# Altium PCB PCB.PcbDoc (part 1 of 2)
Units mm, origin at the board's own origin, x right, y up, seen from the top; angles counter-clockwise.
Board outline 25.16 x 25.16 mm, 8 copper layers (Top Layer, Mid-Layer 1, Mid-Layer 2, GND, PWR, Mid-Layer 3, Mid-Layer 4, Bottom Layer); 154 components, 133 nets, 602 pads, 294 vias.
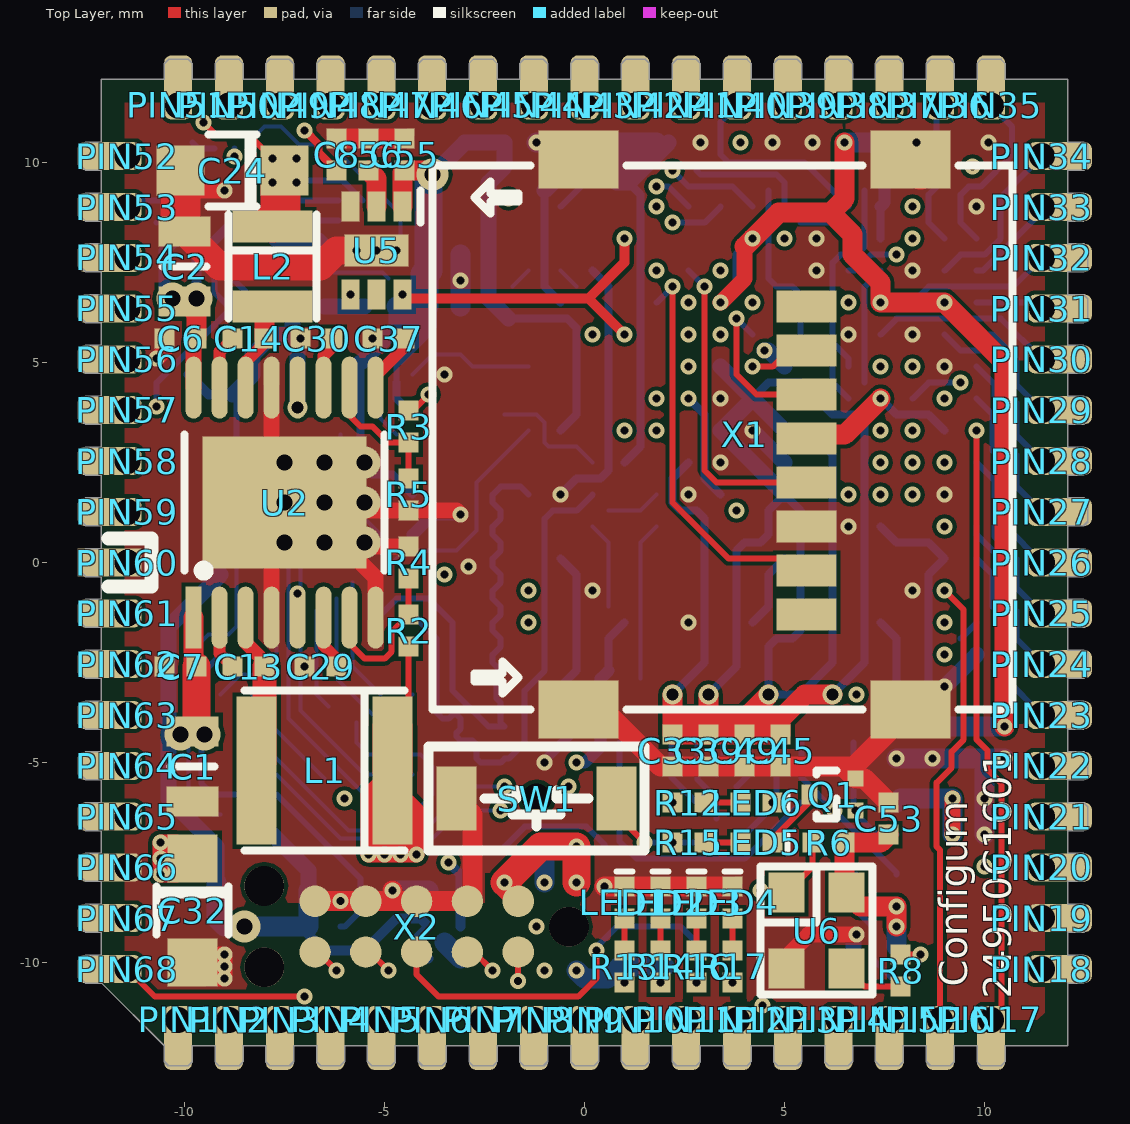
[diagram p0: Top Layer view]
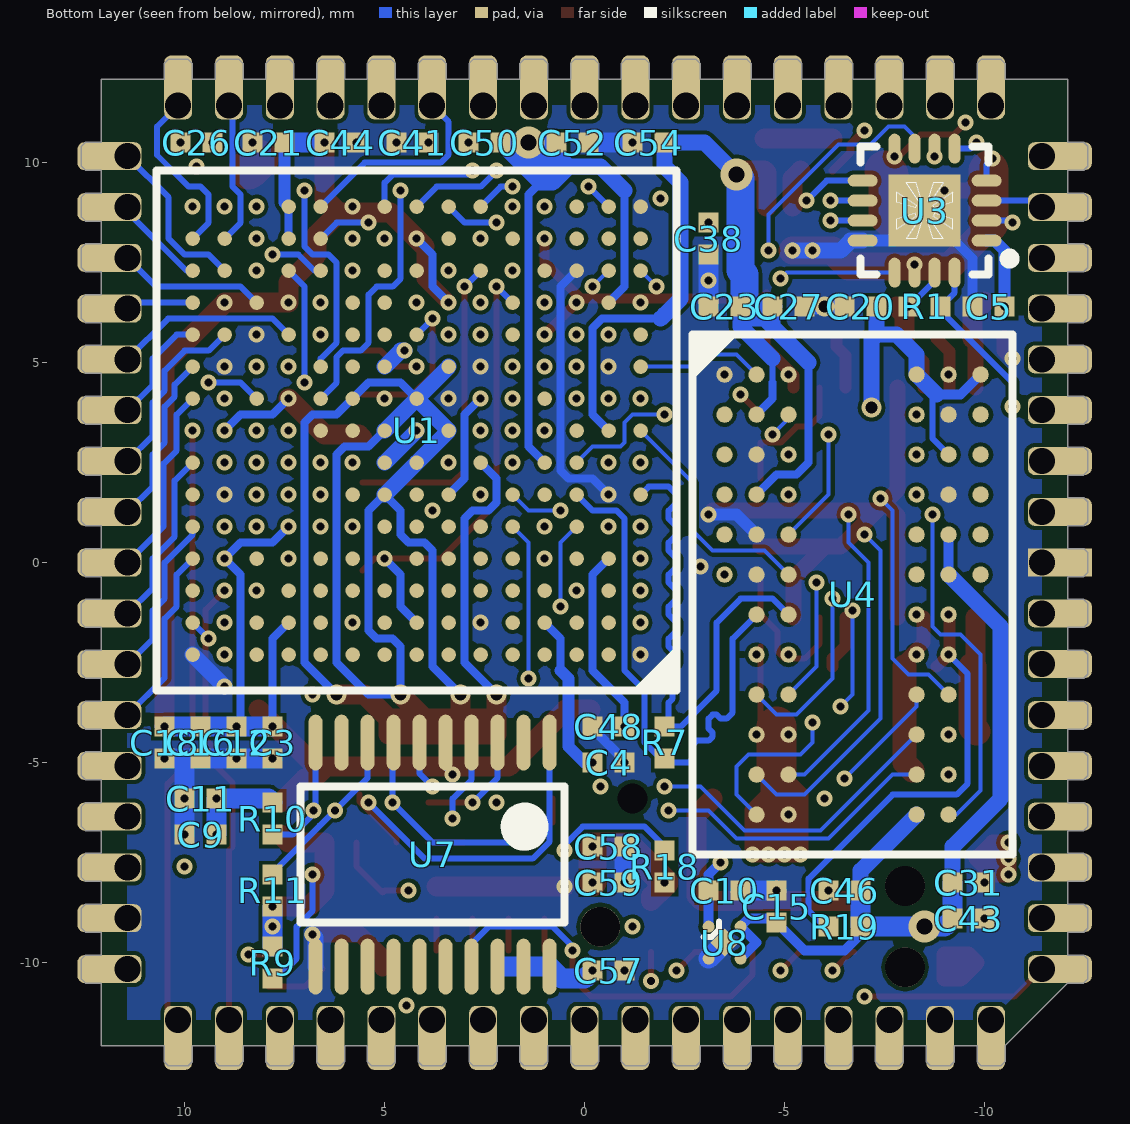
[diagram p1: Bottom Layer view, seen from below]
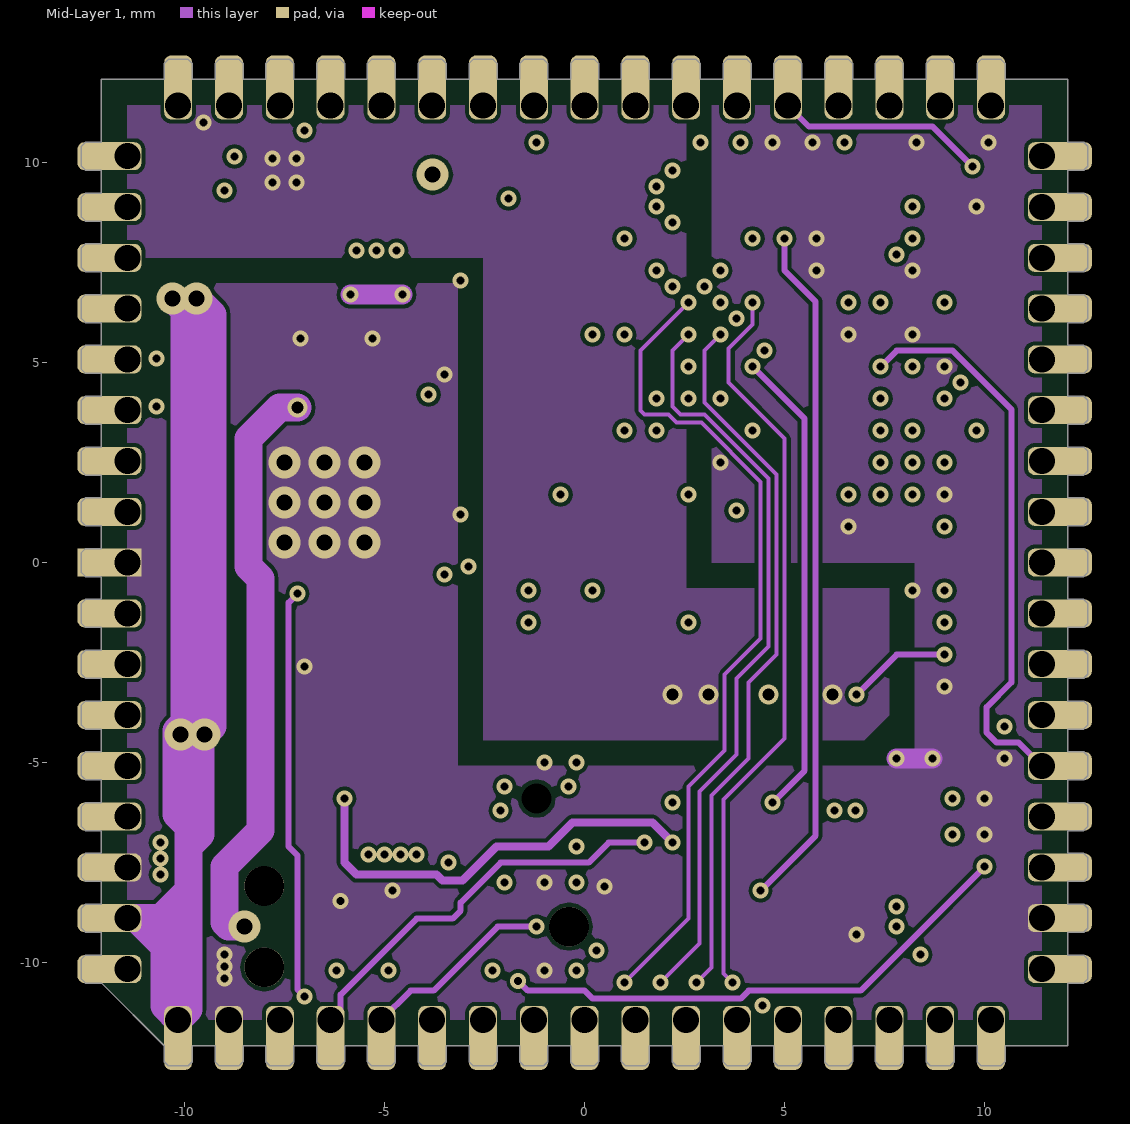
[diagram p2: Mid-Layer 1]
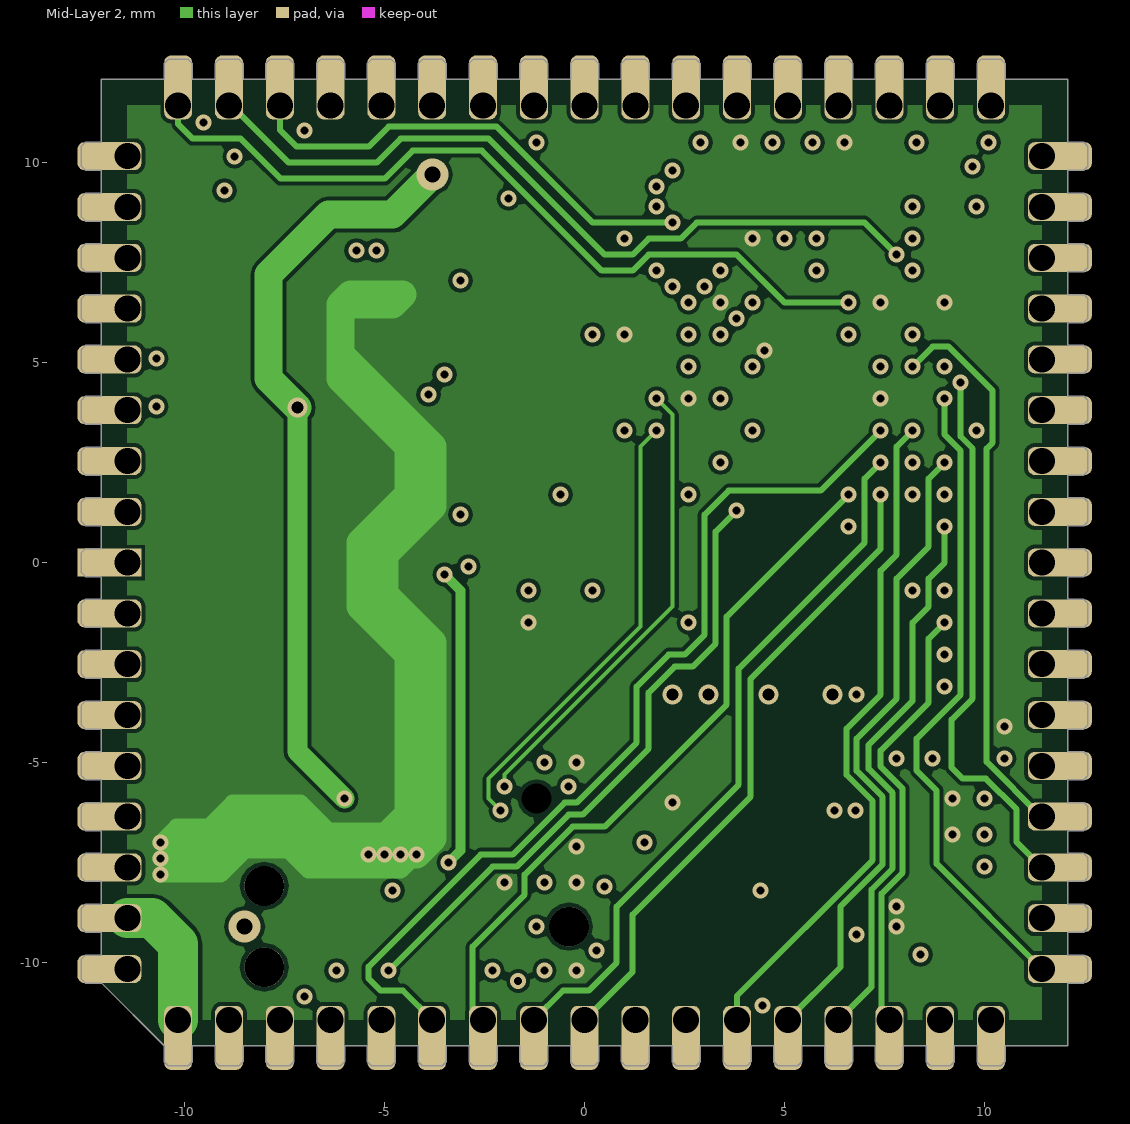
[diagram p3: Mid-Layer 2]
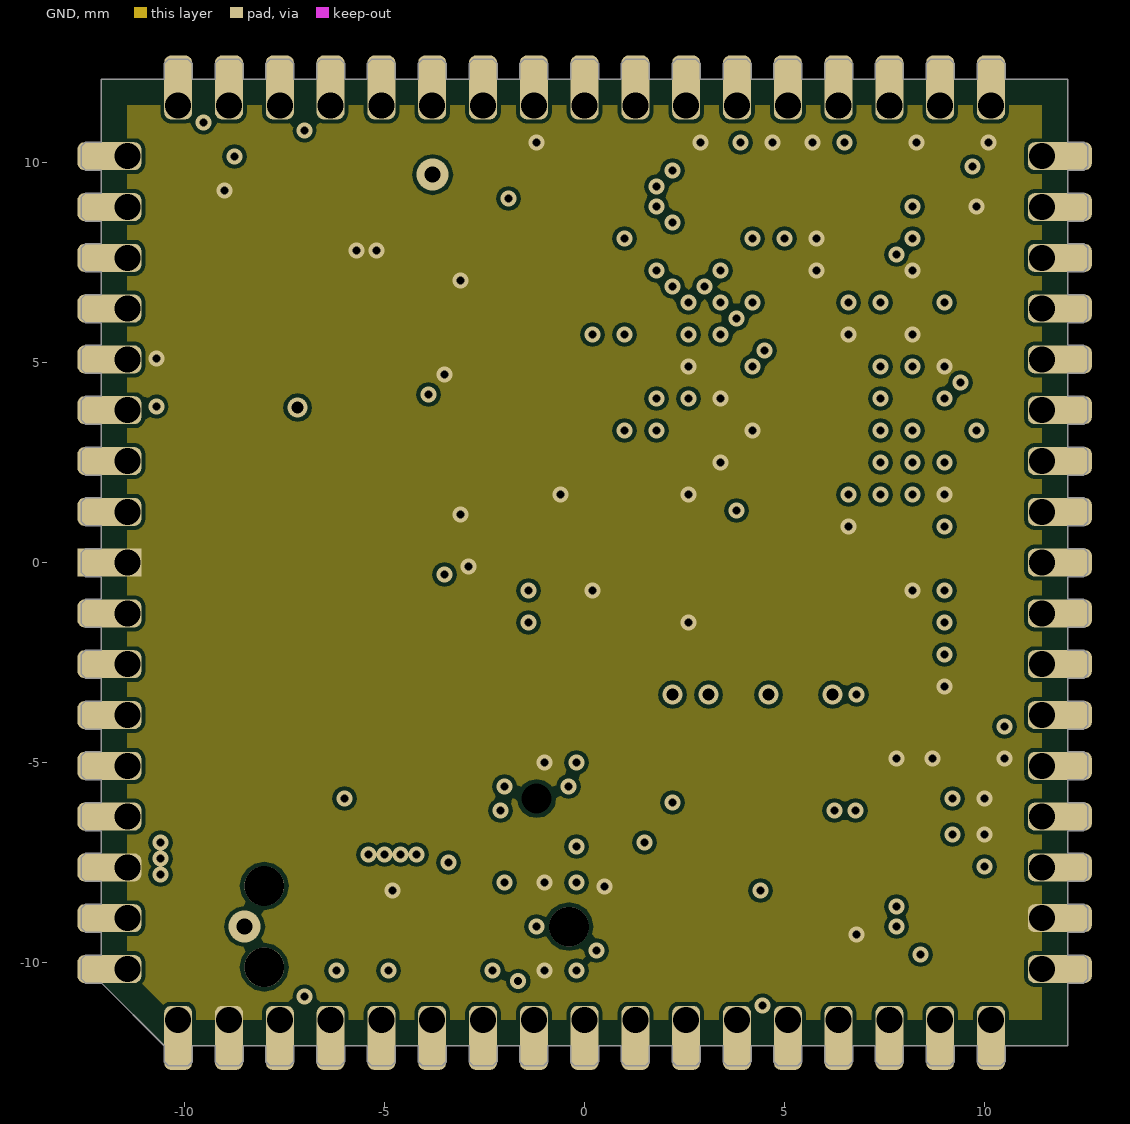
[diagram p4: GND]
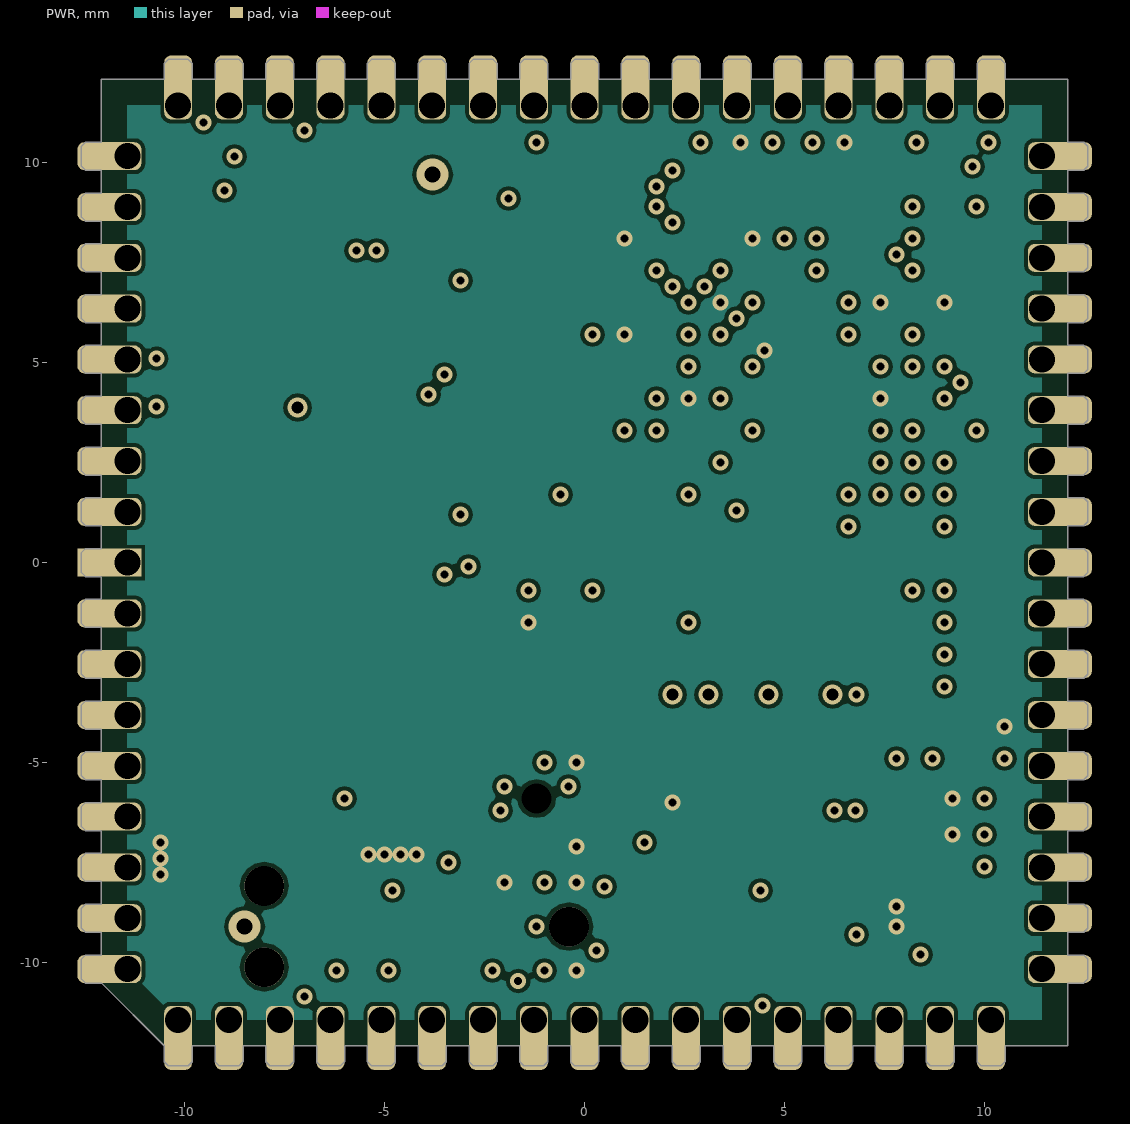
[diagram p5: PWR]
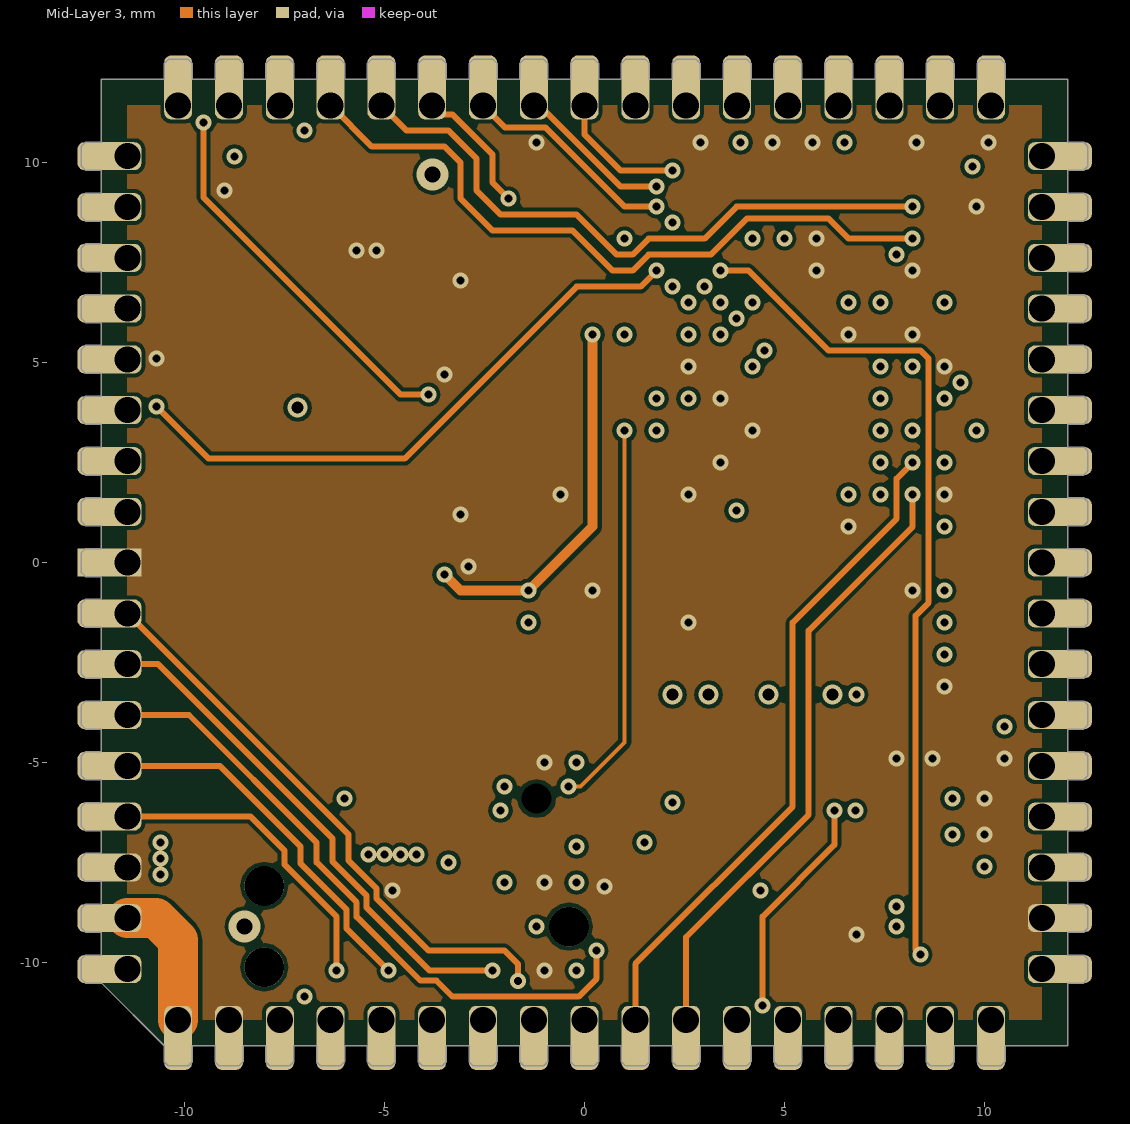
[diagram p6: Mid-Layer 3]
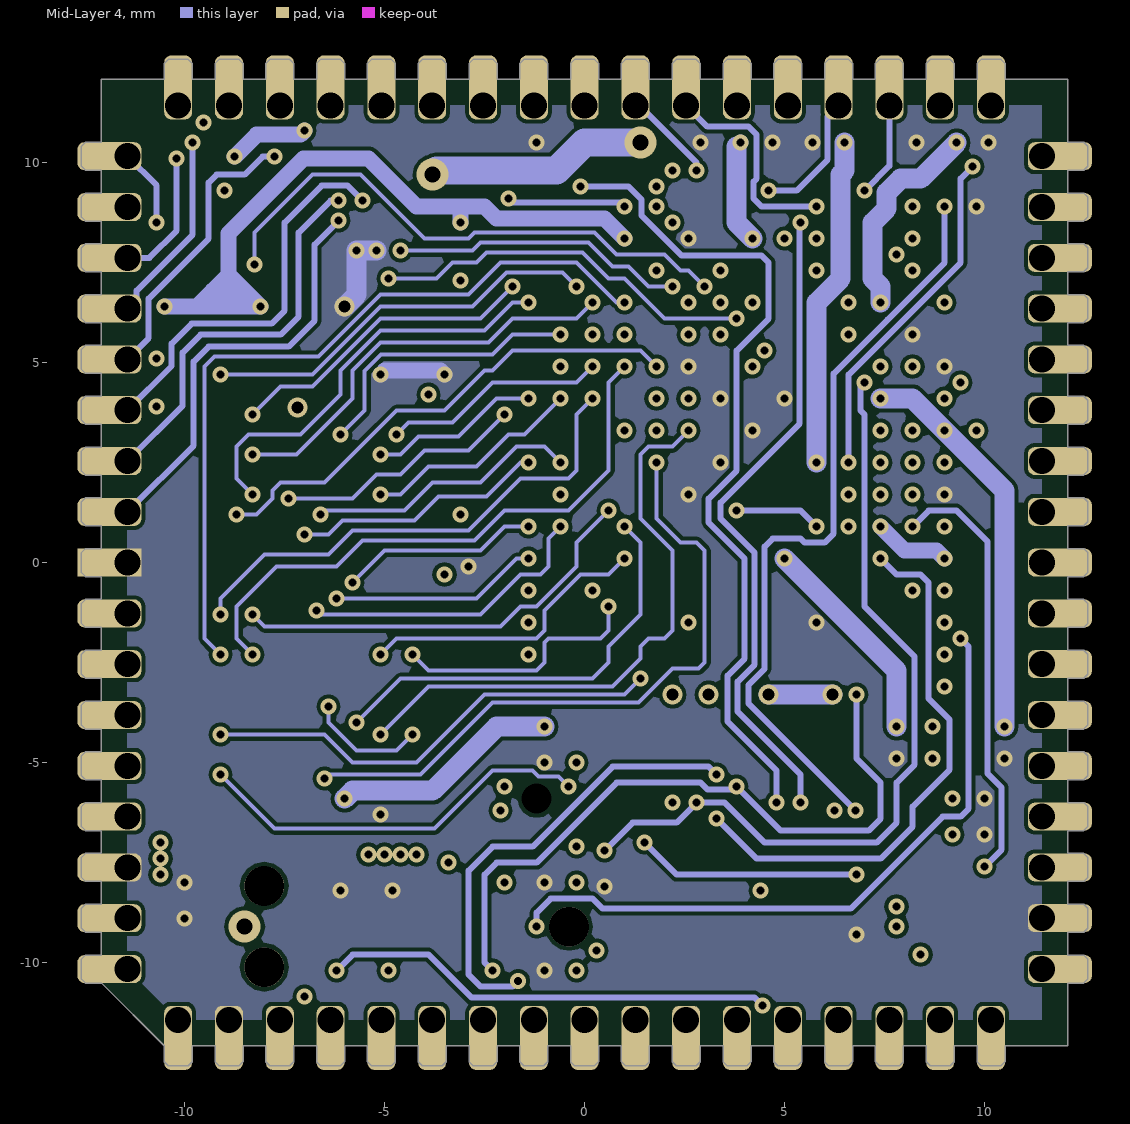
[diagram p7: Mid-Layer 4]

## Layer stack, top to bottom
Top Solder: solder mask 0.0102, Solder Resist, Dk 3.5
Top Layer: signal copper 0.0356
Dielectric1: core 0.32, FR-4, Dk 4.8
Mid-Layer 1: signal copper 0.0356
Dielectric2: prepreg 0.32, FR-4, Dk 4.8
Mid-Layer 2: signal copper 0.0356
Dielectric3: core 0.32, FR-4, Dk 4.8
GND: signal copper 0.0356
Dielectric6: prepreg 0.32, FR-4, Dk 4.8
PWR: signal copper 0.0356
Dielectric7: core 0.32, FR-4, Dk 4.8
Mid-Layer 3: signal copper 0.0356
Dielectric4: prepreg 0.32, FR-4, Dk 4.8
Mid-Layer 4: signal copper 0.0356
Dielectric5: core 0.32, FR-4, Dk 4.8
Bottom Layer: signal copper 0.0356
Bottom Solder: solder mask 0.0102, Solder Resist, Dk 3.5

## Board outline
412 vertices, not listed, extent -12.58,-12.58 12.58,12.58

## Design rules (kind name [scope] priority, off if disabled: settings)
Clearance [All] p1: gap=0.1
ComponentClearance [All] p1: gap=0.25 collisioncheckmode=3 verticalgap=0.25 showdistances=FALSE
Height [All] p1: minheight=0 maxheight=20 prefheight=1
HoleSize [All] p1: absolutevalues=TRUE maxlimit=25 minlimit=0.025 maxpercent=80.000 minpercent=20.000
HoleToHoleClearance [All] p1: gap=0 allowstackedmicrovias=TRUE
MinimumSolderMaskSliver [All] p1: minsoldermaskwidth=-25
PolygonConnect [All] p1: connectstyle=Direct reliefconductorwidth=0.254 reliefentries=4 polygonreliefangle="90 Angle" airgapwidth=0.254
RoutingCorners [All] p1: cornerstyle=45-Degree minsetback=2.5 maxsetback=2.5
RoutingTopology [All] p1: topology=Daisy_Balanced
RoutingVias [All] p1: holewidth=0.2 width=0.4 viastyle="Through Hole" minholewidth=0.2 minwidth=0.4 maxholewidth=0.75 maxwidth=1.5
SilkToSilkClearance [All] p1: silktosilkclearance=-25
SilkToSolderMaskClearance SilkscreenOverComponentPads [IsPad] p1: minsilkscreentomaskgap=-25 clearancetoexposedcopper=TRUE
SolderMaskExpansion [All] p1: expansion=0.102
Width [All] p1: maxlimit=1 minlimit=0.1 preferedwidth=0.15
21 further rules are at their usual default settings.

## Components (designator, comment, footprint, x,y, rotation, side; value= is the part's Value field where it differs from the comment)
C1 "C2012X5R1V106K085AC" _0805 -9.8,-5.1 r90 top
C2 "C2012X5R1V106K085AC" _0805 -10,7.4 r90 top
C3 "1u" _0402 7.8,-4.5 r90 bottom
C4 "1u" _0402 -0.6,-5 r180 bottom
C5 "1u" _0402 -10.1,6.4 r180 bottom
C6 "100n" _0402 -10.1,5.6 r0 top
C7 "100n" _0402 -10.1,-2.6 r180 top
C8 "1u" _0402 -6.2,10.2 r90 top
C9 "1u" _0402 9.6,-6.8 r180 bottom
C10 "1u" _0402 -3.5,-8.2 r0 bottom
C11 "1u" _0402 9.6,-5.9 r180 bottom
C12 "1u" _0402 8.7,-4.5 r270 bottom
C13 "100n" _0402 -8.4,-2.6 r180 top
C14 "100n" _0402 -8.4,5.6 r180 top
C15 "1u" _0402 -4.8,-8.6 r270 bottom
C16 "1u" _0402 9.6,-4.5 r270 bottom
C18 "1u" _0402 10.5,-4.5 r90 bottom
C20 "1u" _0402 -6.9,6.4 r0 bottom
C21 "1u" _0402 7.9,10.5 r180 bottom
C23 "1u" _0402 -3.5,6.4 r0 bottom
C24 "JMK316ABJ476MLHT" "Case A (3216)" -8.8,9.8 r180 top
C26 "1u" _0402 9.7,10.5 r0 bottom
C27 "1u" _0402 -5.1,6.4 r180 bottom
C29 "1n" _0402 -6.6,-2.6 r0 top
C30 "1n" _0402 -6.7,5.6 r0 top
C31 "1u" _0402 -9.6,-8 r180 bottom
C32 "JMK316ABJ476MLHT" "Case A (3216)" -9.8,-8.7 r270 top
C33 "1u" _0402 2.2,-4.7 r270 top
C37 "1u" _0402 -4.9,5.6 r180 top
C38 "1u" _0402 -3.1,8.1 r90 bottom
C39 "1u" _0402 3.1,-4.7 r270 top
C41 "1u" _0402 4.3,10.5 r180 bottom
C43 "1u" _0402 -9.6,-8.9 r180 bottom
C44 "1u" _0402 6.1,10.5 r0 bottom
C45 "1u" _0402 4.9,-4.7 r270 top
C46 "1u" _0402 -6.5,-8.2 r0 bottom
C48 "1u" _0402 -0.6,-4.1 r180 bottom
C49 "1u" _0402 4,-4.7 r270 top
C50 "1u" _0402 2.5,10.5 r180 bottom
C52 "1u" _0402 0.3,10.5 r0 bottom
C53 "1u" _0402 7.6,-6.4 r90 top
C54 "1u" _0402 -1.6,10.5 r180 bottom
C55 "1u" _0402 -4.5,10.2 r90 top
C56 "1u" _0402 -5.4,10.2 r270 top
C57 "1u" _0402 -0.6,-10.2 r0 bottom
C58 "1u" _0402 -0.6,-7.1 r0 bottom
C59 "1u" _0402 -0.6,-8 r0 bottom
L1 "XAL4030-332MEB" IND_4X4 -6.5,-5.2 r180 top
L2 "SRP2512-2R2M" IND_2.5x2 -7.8,7.4 r270 top
LED1 "0402R" _0402+ 1,-8.5 r270 top
LED2 "0402Y" _0402+ 1.9,-8.5 r270 top
LED3 "0402G" _0402+ 2.8,-8.5 r270 top
LED4 "0402B" _0402+ 3.7,-8.5 r270 top
LED5 "0402G" _0402+ 4.3,-7 r180 top
LED6 "0402Y" _0402+ 4.3,-6 r180 top
PIN1 "Pin/Pad" "PLCC68 pin"#1 -10.16,-11.43 r0 top
PIN2 "Pin/Pad" "PLCC68 pin"#2 -8.89,-11.43 r0 top
PIN3 "Pin/Pad" "PLCC68 pin"#3 -7.62,-11.43 r0 top
PIN4 "Pin/Pad" "PLCC68 pin"#4 -6.35,-11.43 r0 top
PIN5 "Pin/Pad" "PLCC68 pin"#5 -5.08,-11.43 r0 top
PIN6 "Pin/Pad" "PLCC68 pin"#6 -3.81,-11.43 r0 top
PIN7 "Pin/Pad" "PLCC68 pin"#7 -2.54,-11.43 r0 top
PIN8 "Pin/Pad" "PLCC68 pin"#8 -1.27,-11.43 r0 top
PIN9 "Pin/Pad" "PLCC68 pin"#9 0,-11.43 r0 top
PIN10 "Pin/Pad" "PLCC68 pin"#10 1.27,-11.43 r0 top
PIN11 "Pin/Pad" "PLCC68 pin"#11 2.54,-11.43 r0 top
PIN12 "Pin/Pad" "PLCC68 pin"#12 3.81,-11.43 r0 top
PIN13 "Pin/Pad" "PLCC68 pin"#13 5.08,-11.43 r0 top
PIN14 "Pin/Pad" "PLCC68 pin"#14 6.35,-11.43 r0 top
PIN15 "Pin/Pad" "PLCC68 pin"#15 7.62,-11.43 r0 top
PIN16 "Pin/Pad" "PLCC68 pin"#16 8.89,-11.43 r0 top
PIN17 "Pin/Pad" "PLCC68 pin"#17 10.16,-11.43 r0 top
PIN18 "Pin/Pad" "PLCC68 pin"#18 11.43,-10.16 r90 top
PIN19 "Pin/Pad" "PLCC68 pin"#19 11.43,-8.89 r90 top
PIN20 "Pin/Pad" "PLCC68 pin"#20 11.43,-7.62 r90 top
PIN21 "Pin/Pad" "PLCC68 pin"#21 11.43,-6.35 r90 top
PIN22 "Pin/Pad" "PLCC68 pin"#22 11.43,-5.08 r90 top
PIN23 "Pin/Pad" "PLCC68 pin"#23 11.43,-3.81 r90 top
PIN24 "Pin/Pad" "PLCC68 pin"#24 11.43,-2.54 r90 top
PIN25 "Pin/Pad" "PLCC68 pin"#25 11.43,-1.27 r90 top
PIN26 "Pin/Pad" "PLCC68 pin"#26 11.43,0 r90 top
PIN27 "Pin/Pad" "PLCC68 pin"#27 11.43,1.27 r90 top
PIN28 "Pin/Pad" "PLCC68 pin"#28 11.43,2.54 r90 top
PIN29 "Pin/Pad" "PLCC68 pin"#29 11.43,3.81 r90 top
PIN30 "Pin/Pad" "PLCC68 pin"#30 11.43,5.08 r90 top
PIN31 "Pin/Pad" "PLCC68 pin"#31 11.43,6.35 r90 top
PIN32 "Pin/Pad" "PLCC68 pin"#32 11.43,7.62 r90 top
PIN33 "Pin/Pad" "PLCC68 pin"#33 11.43,8.89 r90 top
PIN34 "Pin/Pad" "PLCC68 pin"#34 11.43,10.16 r90 top
PIN35 "Pin/Pad" "PLCC68 pin"#35 10.16,11.43 r180 top
PIN36 "Pin/Pad" "PLCC68 pin"#36 8.89,11.43 r180 top
PIN37 "Pin/Pad" "PLCC68 pin"#37 7.62,11.43 r180 top
PIN38 "Pin/Pad" "PLCC68 pin"#38 6.35,11.43 r180 top
PIN39 "Pin/Pad" "PLCC68 pin"#39 5.08,11.43 r180 top
PIN40 "Pin/Pad" "PLCC68 pin"#40 3.81,11.43 r180 top
PIN41 "Pin/Pad" "PLCC68 pin"#41 2.54,11.43 r180 top
PIN42 "Pin/Pad" "PLCC68 pin"#42 1.27,11.43 r180 top
PIN43 "Pin/Pad" "PLCC68 pin"#43 0,11.43 r180 top
PIN44 "Pin/Pad" "PLCC68 pin"#44 -1.27,11.43 r180 top
PIN45 "Pin/Pad" "PLCC68 pin"#45 -2.54,11.43 r180 top
PIN46 "Pin/Pad" "PLCC68 pin"#46 -3.81,11.43 r180 top
PIN47 "Pin/Pad" "PLCC68 pin"#47 -5.08,11.43 r180 top
PIN48 "Pin/Pad" "PLCC68 pin"#48 -6.35,11.43 r180 top
PIN49 "Pin/Pad" "PLCC68 pin"#49 -7.62,11.43 r180 top
PIN50 "Pin/Pad" "PLCC68 pin"#50 -8.89,11.43 r180 top
PIN51 "Pin/Pad" "PLCC68 pin"#51 -10.16,11.43 r180 top
PIN52 "Pin/Pad" "PLCC68 pin"#52 -11.43,10.16 r270 top
PIN53 "Pin/Pad" "PLCC68 pin"#53 -11.43,8.89 r270 top
PIN54 "Pin/Pad" "PLCC68 pin"#54 -11.43,7.62 r270 top
PIN55 "Pin/Pad" "PLCC68 pin"#55 -11.43,6.35 r270 top
PIN56 "Pin/Pad" "PLCC68 pin"#56 -11.43,5.08 r270 top
PIN57 "Pin/Pad" "PLCC68 pin"#57 -11.43,3.81 r270 top
PIN58 "Pin/Pad" "PLCC68 pin"#58 -11.43,2.54 r270 top
PIN59 "Pin/Pad" "PLCC68 pin"#59 -11.43,1.27 r270 top
PIN60 "Pin/Pad" "PLCC68 pin"#60 -11.43,0 r270 top
PIN61 "Pin/Pad" "PLCC68 pin"#61 -11.43,-1.27 r270 top
PIN62 "Pin/Pad" "PLCC68 pin"#62 -11.43,-2.54 r270 top
PIN63 "Pin/Pad" "PLCC68 pin"#63 -11.43,-3.81 r270 top
PIN64 "Pin/Pad" "PLCC68 pin"#64 -11.43,-5.08 r270 top
PIN65 "Pin/Pad" "PLCC68 pin"#65 -11.43,-6.35 r270 top
PIN66 "Pin/Pad" "PLCC68 pin"#66 -11.43,-7.62 r270 top
PIN67 "Pin/Pad" "PLCC68 pin"#67 -11.43,-8.89 r270 top
PIN68 "Pin/Pad" "PLCC68 pin"#68 -11.43,-10.16 r270 top
Q1 "NTK3043N" SC105-3 6.2,-5.8 r90 top
R1 "10k" _0402 -8.5,6.4 r180 bottom
R2 "73k2" _0402 -4.4,-1.7 r270 top
R3 "12k7" _0402 -4.4,3.4 r90 top
R4 "22k" _0402 -4.4,0 r270 top
R5 "22k" _0402 -4.4,1.7 r90 top
R6 "100k" _0402 6.1,-7 r180 top
R7 "120R" _0402 -2,-4.5 r90 bottom
R8 "24R9" _0402 7.9,-10.2 r90 top
R9 "4k7" _0402 7.8,-10 r270 bottom
R10 "330R" _0402 7.8,-6.4 r270 bottom
R11 "4k7" _0402 7.8,-8.2 r90 bottom
R12 "1k" _0402 2.6,-6 r0 top
R13 "1k" _0402 1,-10.1 r270 top
R14 "1k" _0402 1.9,-10.1 r270 top
R15 "2k2" _0402 2.6,-7 r180 top
R16 "1k" _0402 2.8,-10.1 r270 top
R17 "1k" _0402 3.7,-10.1 r270 top
R18 "1k" _0402 -2,-7.6 r270 bottom
R19 "4k7" _0402 -6.5,-9.1 r180 bottom
SW1 "B3U-1000P-B" B3U-1000P-B -1.2,-5.9 r180 top
U1 "XC6SLX16-2CSG225I" CSG225 4.2,3.3 r0 bottom
U2 "TPS54495PWPR" TSOP65P650X110_HS-16N -7.5,1.5 r90 top
U3 "AD5592RBCPZ-1-RL7" QFN50P300X300-16V4N -8.503,8.8 r0 bottom
U4 "IS43R86400D" BGA60C80P12X9_1300X800X120 -6.7,-0.8 r180 bottom
U5 "TPS7A3725DRVR" SON65P200x200_HS-6N -5.2,7.8 r270 top
U6 "501AAA24M0000DAGR" "Osc 25x20 (4)" 5.8,-9.2 r270 top
U7 "XCF04SVOG20C" VOG20_L 3.8,-7.3 r270 bottom
U8 "BU1CTD2WNVX" DFN65P100x100-4 -3.5,-9.5 r270 bottom
X1 "47219-2001" MOLEX_47219-2001 4,3.2 r90 top
X2 "TC2050-NL" TC2050-NL -4.2,-9.1 r180 top

## Footprints (in the part's own frame and the unit in brackets; to place one, negate y for a bottom-side part, rotate by r counter-clockwise, add the part's x,y. Pads: shape width x height; smd on the part's side, far side on the other; paste and mask are expansions set on the pad)
_0402 [mm]
  rect 0.5x0.5 smd: 1(-0.4,0) 2(0.4,0)
  body extent -0.53,-0.27 0.53,0.28, height 0.5
_0402+ [mm]
  rect 0.5x0.5 smd: 1(-0.4,0) 2(0.4,0)
  silkscreen extent -0.77,-0.2 -0.77,0.2, body extent -0.53,-0.27 0.53,0.28, height 0.5
_0805 [mm]
  rect 0.75x1.3 smd: 1(-0.875,0) 2(0.875,0)
  silkscreen extent 0,-0.55 0,0.55, body extent -1.02,-0.65 1.02,0.65, height 0.85
B3U-1000P-B [mm] "OMRON Mirco-switch B3U series, no ground, with boss"
  round 0 hole 0.75: 0(0,0)
  rect 1x1.6 smd: 1(-2,0) 2(2,0)
  silkscreen extent -2.7,-1.3 2.7,1.3, body extent -2.7,-1.3 2.7,1.3, height 1.8
BGA60C80P12X9_1300X800X120 [mm] "BGA, 60-Leads, Body 13.00x8.00mmx1.20mm, Pitch 0.80mm"
  round 0.41 smd: A1(-3.2,5.5) A2(-2.4,5.5) A3(-1.6,5.5) A7(1.6,5.5) A8(2.4,5.5) A9(3.2,5.5) B1(-3.2,4.5) B2(-2.4,4.5) B3(-1.6,4.5) B7(1.6,4.5) B8(2.4,4.5) B9(3.2,4.5) C1(-3.2,3.5) C2(-2.4,3.5) C3(-1.6,3.5) C7(1.6,3.5) C8(2.4,3.5) C9(3.2,3.5) D1(-3.2,2.5) D2(-2.4,2.5) D3(-1.6,2.5) D7(1.6,2.5) D8(2.4,2.5) D9(3.2,2.5) E1(-3.2,1.5) E2(-2.4,1.5) E3(-1.6,1.5) E7(1.6,1.5) E8(2.4,1.5) E9(3.2,1.5) F1(-3.2,0.5) F2(-2.4,0.5) F3(-1.6,0.5) F7(1.6,0.5) F8(2.4,0.5) F9(3.2,0.5) G2(-2.4,-0.5) G3(-1.6,-0.5) G7(1.6,-0.5) G8(2.4,-0.5) H2(-2.4,-1.5) H3(-1.6,-1.5) H7(1.6,-1.5) H8(2.4,-1.5) J2(-2.4,-2.5) J3(-1.6,-2.5) J7(1.6,-2.5) J8(2.4,-2.5) K2(-2.4,-3.5) K3(-1.6,-3.5) K7(1.6,-3.5) K8(2.4,-3.5) L2(-2.4,-4.5) L3(-1.6,-4.5) L7(1.6,-4.5) L8(2.4,-4.5) M2(-2.4,-5.5) M3(-1.6,-5.5) M7(1.6,-5.5) M8(2.4,-5.5)
  silkscreen extent -4,-6.5 4,6.5, body extent -4,-6.5 4,6.5, height 1.2
"Case A (3216)" [mm]
  rect 1.2x1.25 smd: 1(-1.3,0) 2(1.3,0)
  silkscreen extent -0.6,-0.9 0.6,0.9, body extent -1.65,-0.85 1.65,0.85, height 1.6
CSG225 [mm] "BGA, 225-Leads, Body 13x13mm, Pitch 0.8mm"
  round 0.36 smd: A1(-5.6,5.6) A2(-4.8,5.6) A3(-4,5.6) A4(-3.2,5.6) A5(-2.4,5.6) A6(-1.6,5.6) A7(-0.8,5.6) A8(0,5.6) A9(0.8,5.6) A10(1.6,5.6) A11(2.4,5.6) A12(3.2,5.6) A13(4,5.6) A14(4.8,5.6) A15(5.6,5.6) B1(-5.6,4.8) B2(-4.8,4.8) B3(-4,4.8) B4(-3.2,4.8) B5(-2.4,4.8) B6(-1.6,4.8) B7(-0.8,4.8) B8(0,4.8) B9(0.8,4.8) B10(1.6,4.8) B11(2.4,4.8) B12(3.2,4.8) B13(4,4.8) B14(4.8,4.8) B15(5.6,4.8) C1(-5.6,4) C2(-4.8,4) C3(-4,4) C4(-3.2,4) C5(-2.4,4) C6(-1.6,4) C7(-0.8,4) C8(0,4) C9(0.8,4) C10(1.6,4) C11(2.4,4) C12(3.2,4) C13(4,4) C14(4.8,4) C15(5.6,4) D1(-5.6,3.2) D2(-4.8,3.2) D3(-4,3.2) D4(-3.2,3.2) D5(-2.4,3.2) D6(-1.6,3.2) D7(-0.8,3.2) D8(0,3.2) D9(0.8,3.2) D10(1.6,3.2) D11(2.4,3.2) D12(3.2,3.2) D13(4,3.2) D14(4.8,3.2) D15(5.6,3.2) E1(-5.6,2.4) E2(-4.8,2.4) E3(-4,2.4) E4(-3.2,2.4) E5(-2.4,2.4) E6(-1.6,2.4) E7(-0.8,2.4) E8(0,2.4) E9(0.8,2.4) E10(1.6,2.4) E11(2.4,2.4) E12(3.2,2.4) E13(4,2.4) E14(4.8,2.4) E15(5.6,2.4) F1(-5.6,1.6) F2(-4.8,1.6) F3(-4,1.6) F4(-3.2,1.6) F5(-2.4,1.6) F6(-1.6,1.6) F7(-0.8,1.6) F8(0,1.6) F9(0.8,1.6) F10(1.6,1.6) F11(2.4,1.6) F12(3.2,1.6) F13(4,1.6) F14(4.8,1.6) F15(5.6,1.6) G1(-5.6,0.8) G2(-4.8,0.8) G3(-4,0.8) G4(-3.2,0.8) G5(-2.4,0.8) G6(-1.6,0.8) G7(-0.8,0.8) G8(0,0.8) G9(0.8,0.8) G10(1.6,0.8) G11(2.4,0.8) G12(3.2,0.8) G13(4,0.8) G14(4.8,0.8) G15(5.6,0.8) H1(-5.6,0) H2(-4.8,0) H3(-4,0) H4(-3.2,0) H5(-2.4,0) H6(-1.6,0) H7(-0.8,0) H8(0,0) H9(0.8,0) H10(1.6,0) H11(2.4,0) H12(3.2,0) H13(4,0) H14(4.8,0) H15(5.6,0) J1(-5.6,-0.8) J2(-4.8,-0.8) J3(-4,-0.8) J4(-3.2,-0.8) J5(-2.4,-0.8) J6(-1.6,-0.8) J7(-0.8,-0.8) J8(0,-0.8) J9(0.8,-0.8) J10(1.6,-0.8) J11(2.4,-0.8) J12(3.2,-0.8) J13(4,-0.8) J14(4.8,-0.8) J15(5.6,-0.8) K1(-5.6,-1.6) K2(-4.8,-1.6) K3(-4,-1.6) K4(-3.2,-1.6) K5(-2.4,-1.6) K6(-1.6,-1.6) K7(-0.8,-1.6) K8(0,-1.6) K9(0.8,-1.6) K10(1.6,-1.6) K11(2.4,-1.6) K12(3.2,-1.6) K13(4,-1.6) K14(4.8,-1.6) K15(5.6,-1.6) L1(-5.6,-2.4) L2(-4.8,-2.4) L3(-4,-2.4) L4(-3.2,-2.4) L5(-2.4,-2.4) L6(-1.6,-2.4) L7(-0.8,-2.4) L8(0,-2.4) L9(0.8,-2.4) L10(1.6,-2.4) L11(2.4,-2.4) L12(3.2,-2.4) L13(4,-2.4) L14(4.8,-2.4) L15(5.6,-2.4) M1(-5.6,-3.2) M2(-4.8,-3.2) M3(-4,-3.2) M4(-3.2,-3.2) M5(-2.4,-3.2) M6(-1.6,-3.2) M7(-0.8,-3.2) M8(0,-3.2) M9(0.8,-3.2) M10(1.6,-3.2) M11(2.4,-3.2) M12(3.2,-3.2) M13(4,-3.2) M14(4.8,-3.2) M15(5.6,-3.2) N1(-5.6,-4) N2(-4.8,-4) N3(-4,-4) N4(-3.2,-4) N5(-2.4,-4) N6(-1.6,-4) N7(-0.8,-4) N8(0,-4) N9(0.8,-4) N10(1.6,-4) N11(2.4,-4) N12(3.2,-4) N13(4,-4) N14(4.8,-4) N15(5.6,-4) P1(-5.6,-4.8) P2(-4.8,-4.8) P3(-4,-4.8) P4(-3.2,-4.8) P5(-2.4,-4.8) P6(-1.6,-4.8) P7(-0.8,-4.8) P8(0,-4.8) P9(0.8,-4.8) P10(1.6,-4.8) P11(2.4,-4.8) P12(3.2,-4.8) P13(4,-4.8) P14(4.8,-4.8) P15(5.6,-4.8) R1(-5.6,-5.6) R2(-4.8,-5.6) R3(-4,-5.6) R4(-3.2,-5.6) R5(-2.4,-5.6) R6(-1.6,-5.6) R7(-0.8,-5.6) R8(0,-5.6) R9(0.8,-5.6) R10(1.6,-5.6) R11(2.4,-5.6) R12(3.2,-5.6) R13(4,-5.6) R14(4.8,-5.6) R15(5.6,-5.6)
  silkscreen extent -6.5,-6.5 6.5,6.5, body extent -6.5,-6.5 6.5,6.5, height 1.4
DFN65P100x100-4 [mm] "1.0 x 1.0 mm DFN4, 0.65mm pitch"
  round 0.3 smd: 1(-0.4,-0.4) 2(0.4,-0.4) 3(0.4,0.4) 4(-0.4,0.4)
  rect 0.5x0.5 smd rot 135: 5(0,0)
  silkscreen extent -0.53,-0.53 -0.14,-0.14, body extent -0.5,-0.5 0.5,0.5, height 0.5
IND_2.5x2 [mm] "Inductor 2.5mm x 2mm"
  rect 0.8x2 smd: 1(-1,0) 2(1,0)
  silkscreen extent -1.3,-1.1 1.3,1.1, body extent -1.2,-1 1.2,1, height 1.2
IND_4X4 [mm] "4mm x 4mm inductor"
  rect 1x3.7 smd: 1(-1.7,0) 2(1.7,0)
  silkscreen extent -2,-2 2,2, body extent -2,-2 2,2, height 3
MOLEX_47219-2001 [mm] "microSD connector (hinge lid type)"
  rect 1.45x2 smd: 0(-6.875,-4.15) 0(-6.875,4.15) 0(6.875,-4.15) 0(6.875,4.15)
  rect 0.8x1.5 smd: 1(3.205,-1.55) 2(2.105,-1.55) 3(1.005,-1.55) 4(-0.095,-1.55) 5(-1.195,-1.55) 6(-2.295,-1.55) 7(-3.395,-1.55) 8(-4.495,-1.55)
  silkscreen extent -6.88,-6.7 6.73,7.8, body extent -6.9,-6.7 6.7,7.8, height 1.9
"Osc 25x20 (4)" [mm] "Oscillator 2.5 x 2.0mm size"
  rect 1x0.9 smd: 1(-0.95,-0.75) 2(0.95,-0.75) 3(0.95,0.75) 4(-0.95,0.75)
  silkscreen extent -1.6,-1.4 1.6,1.4, body extent -1.3,-1 1.3,1, height 0.6
"PLCC68 pin"#1 [mm]
  rrect50% 0.7x1.6 hole 0.65 copper offset 0,-0.45: 10(0,0)
"PLCC68 pin"#2 [mm]
  rrect50% 0.7x1.6 hole 0.65 copper offset 0,-0.45: 11(0,0)
"PLCC68 pin"#3 [mm]
  rrect50% 0.7x1.6 hole 0.65 copper offset 0,-0.45: 12(0,0)
"PLCC68 pin"#4 [mm]
  rrect50% 0.7x1.6 hole 0.65 copper offset 0,-0.45: 13(0,0)
"PLCC68 pin"#5 [mm]
  rrect50% 0.7x1.6 hole 0.65 copper offset 0,-0.45: 14(0,0)
"PLCC68 pin"#6 [mm]
  rrect50% 0.7x1.6 hole 0.65 copper offset 0,-0.45: 15(0,0)
"PLCC68 pin"#7 [mm]
  rrect50% 0.7x1.6 hole 0.65 copper offset 0,-0.45: 16(0,0)
"PLCC68 pin"#8 [mm]
  rrect50% 0.7x1.6 hole 0.65 copper offset 0,-0.45: 17(0,0)
"PLCC68 pin"#9 [mm]
  rrect50% 0.7x1.6 hole 0.65 copper offset 0,-0.45: 18(0,0)
"PLCC68 pin"#10 [mm]
  rrect50% 0.7x1.6 hole 0.65 copper offset 0,-0.45: 19(0,0)
"PLCC68 pin"#11 [mm]
  rrect50% 0.7x1.6 hole 0.65 copper offset 0,-0.45: 20(0,0)
"PLCC68 pin"#12 [mm]
  rrect50% 0.7x1.6 hole 0.65 copper offset 0,-0.45: 21(0,0)
"PLCC68 pin"#13 [mm]
  rrect50% 0.7x1.6 hole 0.65 copper offset 0,-0.45: 22(0,0)
"PLCC68 pin"#14 [mm]
  rrect50% 0.7x1.6 hole 0.65 copper offset 0,-0.45: 23(0,0)
"PLCC68 pin"#15 [mm]
  rrect50% 0.7x1.6 hole 0.65 copper offset 0,-0.45: 24(0,0)
"PLCC68 pin"#16 [mm]
  rrect50% 0.7x1.6 hole 0.65 copper offset 0,-0.45: 25(0,0)
"PLCC68 pin"#17 [mm]
  rrect50% 0.7x1.6 hole 0.65 copper offset 0,-0.45: 26(0,0)
"PLCC68 pin"#18 [mm]
  rrect50% 0.7x1.6 hole 0.65 copper offset 0,-0.45: 27(0,0)
"PLCC68 pin"#19 [mm]
  rrect50% 0.7x1.6 hole 0.65 copper offset 0,-0.45: 28(0,0)
"PLCC68 pin"#20 [mm]
  rrect50% 0.7x1.6 hole 0.65 copper offset 0,-0.45: 29(0,0)
"PLCC68 pin"#21 [mm]
  rrect50% 0.7x1.6 hole 0.65 copper offset 0,-0.45: 30(0,0)
"PLCC68 pin"#22 [mm]
  rrect50% 0.7x1.6 hole 0.65 copper offset 0,-0.45: 31(0,0)
"PLCC68 pin"#23 [mm]
  rrect50% 0.7x1.6 hole 0.65 copper offset 0,-0.45: 32(0,0)
"PLCC68 pin"#24 [mm]
  rrect50% 0.7x1.6 hole 0.65 copper offset 0,-0.45: 33(0,0)
"PLCC68 pin"#25 [mm]
  rrect50% 0.7x1.6 hole 0.65 copper offset 0,-0.45: 34(0,0)
"PLCC68 pin"#26 [mm]
  rrect50% 0.7x1.6 hole 0.65 copper offset 0,-0.45: 35(0,0)
"PLCC68 pin"#27 [mm]
  rrect50% 0.7x1.6 hole 0.65 copper offset 0,-0.45: 36(0,0)
"PLCC68 pin"#28 [mm]
  rrect50% 0.7x1.6 hole 0.65 copper offset 0,-0.45: 37(0,0)
"PLCC68 pin"#29 [mm]
  rrect50% 0.7x1.6 hole 0.65 copper offset 0,-0.45: 38(0,0)
"PLCC68 pin"#30 [mm]
  rrect50% 0.7x1.6 hole 0.65 copper offset 0,-0.45: 39(0,0)
"PLCC68 pin"#31 [mm]
  rrect50% 0.7x1.6 hole 0.65 copper offset 0,-0.45: 40(0,0)
"PLCC68 pin"#32 [mm]
  rrect50% 0.7x1.6 hole 0.65 copper offset 0,-0.45: 41(0,0)
"PLCC68 pin"#33 [mm]
  rrect50% 0.7x1.6 hole 0.65 copper offset 0,-0.45: 42(0,0)
"PLCC68 pin"#34 [mm]
  rrect50% 0.7x1.6 hole 0.65 copper offset 0,-0.45: 43(0,0)
"PLCC68 pin"#35 [mm]
  rrect50% 0.7x1.6 hole 0.65 copper offset 0,-0.45: 44(0,0)
"PLCC68 pin"#36 [mm]
  rrect50% 0.7x1.6 hole 0.65 copper offset 0,-0.45: 45(0,0)
"PLCC68 pin"#37 [mm]
  rrect50% 0.7x1.6 hole 0.65 copper offset 0,-0.45: 46(0,0)
"PLCC68 pin"#38 [mm]
  rrect50% 0.7x1.6 hole 0.65 copper offset 0,-0.45: 47(0,0)
"PLCC68 pin"#39 [mm]
  rrect50% 0.7x1.6 hole 0.65 copper offset 0,-0.45: 48(0,0)
"PLCC68 pin"#40 [mm]
  rrect50% 0.7x1.6 hole 0.65 copper offset 0,-0.45: 49(0,0)
"PLCC68 pin"#41 [mm]
  rrect50% 0.7x1.6 hole 0.65 copper offset 0,-0.45: 50(0,0)
"PLCC68 pin"#42 [mm]
  rrect50% 0.7x1.6 hole 0.65 copper offset 0,-0.45: 51(0,0)
"PLCC68 pin"#43 [mm]
  rrect50% 0.7x1.6 hole 0.65 copper offset 0,-0.45: 52(0,0)
"PLCC68 pin"#44 [mm]
  rrect50% 0.7x1.6 hole 0.65 copper offset 0,-0.45: 53(0,0)
"PLCC68 pin"#45 [mm]
  rrect50% 0.7x1.6 hole 0.65 copper offset 0,-0.45: 54(0,0)
"PLCC68 pin"#46 [mm]
  rrect50% 0.7x1.6 hole 0.65 copper offset 0,-0.45: 55(0,0)
"PLCC68 pin"#47 [mm]
  rrect50% 0.7x1.6 hole 0.65 copper offset 0,-0.45: 56(0,0)
"PLCC68 pin"#48 [mm]
  rrect50% 0.7x1.6 hole 0.65 copper offset 0,-0.45: 57(0,0)
"PLCC68 pin"#49 [mm]
  rrect50% 0.7x1.6 hole 0.65 copper offset 0,-0.45: 58(0,0)
"PLCC68 pin"#50 [mm]
  rrect50% 0.7x1.6 hole 0.65 copper offset 0,-0.45: 59(0,0)
"PLCC68 pin"#51 [mm]
  rrect50% 0.7x1.6 hole 0.65 copper offset 0,-0.45: 60(0,0)
"PLCC68 pin"#52 [mm]
  rrect50% 0.7x1.6 hole 0.65 copper offset 0,-0.45: 61(0,0)
"PLCC68 pin"#53 [mm]
  rrect50% 0.7x1.6 hole 0.65 copper offset 0,-0.45: 62(0,0)
"PLCC68 pin"#54 [mm]
  rrect50% 0.7x1.6 hole 0.65 copper offset 0,-0.45: 63(0,0)
"PLCC68 pin"#55 [mm]
  rrect50% 0.7x1.6 hole 0.65 copper offset 0,-0.45: 64(0,0)
"PLCC68 pin"#56 [mm]
  rrect50% 0.7x1.6 hole 0.65 copper offset 0,-0.45: 65(0,0)
"PLCC68 pin"#57 [mm]
  rrect50% 0.7x1.6 hole 0.65 copper offset 0,-0.45: 66(0,0)
"PLCC68 pin"#58 [mm]
  rrect50% 0.7x1.6 hole 0.65 copper offset 0,-0.45: 67(0,0)
"PLCC68 pin"#59 [mm]
  rrect50% 0.7x1.6 hole 0.65 copper offset 0,-0.45: 68(0,0)
"PLCC68 pin"#60 [mm]
  rect 0.7x1.6 hole 0.65 copper offset 0,-0.45: 1(0,0)
"PLCC68 pin"#61 [mm]
  rrect50% 0.7x1.6 hole 0.65 copper offset 0,-0.45: 2(0,0)
"PLCC68 pin"#62 [mm]
  rrect50% 0.7x1.6 hole 0.65 copper offset 0,-0.45: 3(0,0)
"PLCC68 pin"#63 [mm]
  rrect50% 0.7x1.6 hole 0.65 copper offset 0,-0.45: 4(0,0)
"PLCC68 pin"#64 [mm]
  rrect50% 0.7x1.6 hole 0.65 copper offset 0,-0.45: 5(0,0)
"PLCC68 pin"#65 [mm]
  rrect50% 0.7x1.6 hole 0.65 copper offset 0,-0.45: 6(0,0)
"PLCC68 pin"#66 [mm]
  rrect50% 0.7x1.6 hole 0.65 copper offset 0,-0.45: 7(0,0)
"PLCC68 pin"#67 [mm]
  rrect50% 0.7x1.6 hole 0.65 copper offset 0,-0.45: 8(0,0)
"PLCC68 pin"#68 [mm]
  rrect50% 0.7x1.6 hole 0.65 copper offset 0,-0.45: 9(0,0)
QFN50P300X300-16V4N [mm]
  oval 0.75x0.3 smd: 1(-1.547,0.75) 2(-1.547,0.25) 3(-1.547,-0.25) 4(-1.547,-0.75) 9(1.553,-0.75) 10(1.553,-0.25) 11(1.553,0.25) 12(1.553,0.75)
  oval 0.3x0.75 smd: 5(-0.747,-1.55) 6(-0.247,-1.55) 7(0.253,-1.55) 8(0.753,-1.55) 13(0.753,1.55) 14(0.253,1.55) 15(-0.247,1.55) 16(-0.747,1.55)
  rect 1.8x1.8 smd: 17(0.003,0)
  silkscreen extent -2.25,-1.6 1.6,1.6, body extent -1.58,-1.58 1.58,1.58, height 0.6
SC105-3 [mm] "SOT 3-pin, 0.8mm x 1.2mm x 0.5mm (SOT-723)"
  rect 0.4x0.4 smd: 1(-0.4,-0.575) 2(0.4,-0.575)
  rect 0.5x0.4 smd: 3(0,0.575)
  silkscreen extent -0.6,-0.1 0.6,0.4, body extent -0.6,-0.4 0.6,0.4, height 0.52
SON65P200x200_HS-6N [mm] "SON, 6-Leads, Body 2.0x2.0mm (max), Pitch 0.65mm,with Power Pad"
  rect 0.75x0.45 smd: 1(-1.1,0.65) 2(-1.1,0) 3(-1.1,-0.65) 4(1.1,-0.65) 5(1.1,0) 6(1.1,0.65)
  rect 0.8x1.6 smd: 7(0,0)
  silkscreen extent -1.5,1.1 -0.7,1.1, body extent -1,-1 1,1, height 0.8
TC2050-NL [mil] "tag-connect.com"
  round 39.02 hole 39.02 unplated: 0(-150,0) 0(150,-40) 0(150,40)
  round 30.98 smd: 1(-100,-25) 2(-100,25) 3(-50,-25) 4(-50,25) 5(0,-25) 6(0,25) 7(50,-25) 8(50,25) 9(100,-25) 10(100,25)
TSOP65P650X110_HS-16N [mm] "TSOP, 16-Leads, Body 5.0x4.4mm (max), Pitch 0.65mm, IPC Medium Density"
  rect 1.55x0.4 smd: 1(-2.875,2.275)
  oval 1.55x0.4 smd: 2(-2.875,1.625) 3(-2.875,0.975) 4(-2.875,0.325) 5(-2.875,-0.325) 6(-2.875,-0.975) 7(-2.875,-1.625) 8(-2.875,-2.275) 9(2.875,-2.275) 10(2.875,-1.625) 11(2.875,-0.975) 12(2.875,-0.325) 13(2.875,0.325) 14(2.875,0.975) 15(2.875,1.625) 16(2.875,2.275)
  rect 3.3x4.1 smd: 17(0,0)
  silkscreen extent -1.82,-2.5 1.7,2.5, body extent -2.2,-2.5 2.2,2.5, height 1.1
VOG20_L [mm] "TSOP, 20-Leads, Body 6.5x4.4mm, Pitch 0.65mm, IPC High Density"
  oval 1.4x0.35 smd: 1(-2.8,2.925) 2(-2.8,2.275) 3(-2.8,1.625) 4(-2.8,0.975) 5(-2.8,0.325) 6(-2.8,-0.325) 7(-2.8,-0.975) 8(-2.8,-1.625) 9(-2.8,-2.275) 10(-2.8,-2.925) 11(2.8,-2.925) 12(2.8,-2.275) 13(2.8,-1.625) 14(2.8,-0.975) 15(2.8,-0.325) 16(2.8,0.325) 17(2.8,0.975) 18(2.8,1.625) 19(2.8,2.275) 20(2.8,2.925)
  silkscreen extent -1.7,-3.3 1.7,3.3, body extent -2.23,-3.3 2.23,3.3, height 1.2

## Part data
C1 C2 C3 C4 C5 C6 C7 C8 C9 C10 C11 C12 C13 C14 C15 C16 C18 C20 C21 C23 C26 C27 C29 C30 C31 C33 C37 C38 C39 C41 C43 C44 C45 C46 C48 C49 C50 C52 C53 C54 C55 C56 C57 C58 C59: library part Capacitor, "Capacitor"
C24 C32: library part Capacitor+, "Polar capacitor"
L1 L2: library part Inductor, "Inductor"
LED1 LED2 LED3 LED4 LED5 LED6: library part LED, "Light Emitting Diode"
PIN1 PIN2 PIN3 PIN4 PIN5 PIN6 PIN7 PIN8 PIN9 PIN10 PIN11 PIN12 PIN13 PIN14 PIN15 PIN16 PIN17 PIN18 PIN19 PIN20 PIN21 PIN22 PIN23 PIN24 PIN25 PIN26 PIN27 PIN28 PIN29 PIN30 PIN31 PIN32 PIN33 PIN34 PIN35 PIN36 PIN37 PIN38 PIN39 PIN40 PIN41 PIN42 PIN43 PIN44 PIN45 PIN46 PIN47 PIN48 PIN49 PIN50 PIN51 PIN52 PIN53 PIN54 PIN55 PIN56 PIN57 PIN58 PIN59 PIN60 PIN61 PIN62 PIN63 PIN64 PIN65 PIN66 PIN67 PIN68: "Single pin/pad"
Q1: library part N-FET, "N-channel FET transistor"
R1 R2 R3 R4 R5 R6 R7 R8 R9 R10 R11 R12 R13 R14 R15 R16 R17 R18 R19: library part Resistor, "Resistor"
SW1: library part "Switch MNO SPST", "Switch, Momentary, Normal Open, SPST"
U1: "Spartan-6 LX 1.2V FPGA, 160 User I/Os, 225-Ball Chip-Scale BGA (0.8mm Pitch), Speed Grade 2, Industrial Grade, Pb-Free"
U2: library part "TPS54495 TSSOP16", "4A/2A Dual Channel Synchronous Step-Down Switcher with Integrated FET"
U3: library part "AD5592R-1 QFN16", "8-Channel, 12-Bit, Configurable ADC/DAC with On-Chip Reference, SPI Interface"
U4: library part "IS43R86400D FBGA60", "64Mx8 DDR SDRAM"
U5: library part TPS7A37, "1% High-Accuracy, 1-A, Low-Dropout Regulator  with Reverse Current Protection"
U6: library part Si50x, "32kHz –100MHz CMEMS Oscillator"
U7: "XCF00S Series, Platform Flash In-System Programmable Configuration 3.3V PROM, 20-Pin TSOP, 4-Megabit, Commercial Grade, Pb-Free"
U8: library part BUxxTD2WNVX, "1.25V 200mA LDO in 1mm x 1mm package"
X1: library part microSD, "microSD card connector"
X2: library part TC2050, "TC2050 nails connector"

## Via types
v1: diameter 0.4, hole 0.2, Top Layer to Bottom Layer, tented top, 89 vias
v2: diameter 0.4, hole 0.2, Mid-Layer 4 to Bottom Layer, 66 vias
v3: diameter 0.4, hole 0.2, Top Layer to Bottom Layer, tented both sides, 49 vias
v4: diameter 0.4, hole 0.2, Mid-Layer 4 to Bottom Layer, tented bottom, 41 vias
v5: diameter 0.4, hole 0.2, Top Layer to Mid-Layer 1, 17 vias
v6: diameter 0.8, hole 0.4, Top Layer to Mid-Layer 1, 13 vias
v7: diameter 0.4, hole 0.2, Top Layer to Bottom Layer, tented bottom, 5 vias
v8: diameter 0.4, hole 0.2, Top Layer to Mid-Layer 1, tented top, 4 vias
v9: diameter 0.5, hole 0.3, Top Layer to Bottom Layer, tented both sides, 4 vias
v10: diameter 0.8, hole 0.4, Top Layer to Bottom Layer, tented both sides, 2 vias
v11: diameter 0.8, hole 0.4, Mid-Layer 4 to Bottom Layer, tented bottom, 1 vias
v12: diameter 0.5, hole 0.3, Mid-Layer 4 to Bottom Layer, tented bottom, 1 vias
v13: diameter 0.5, hole 0.3, Top Layer to Bottom Layer, tented bottom, 1 vias
v14: diameter 0.4, hole 0.2, Top Layer to Bottom Layer, 1 vias

## Nets (pads, with @x,y where several pads share a name; then routed paths per layer and width w, separated by ;. In a path a pad name is that pad's centre, name@x,y a point inside that pad or via, vN(x,y) a via of type N, cw(c..) or ccw(c..) an arc to the next point about the centre after c; other vN are vias at no path point)
+1V2: C24.1 C33.1 C39.1 C45.1 C49.1 L2.1 R3.2 U1.F9 U1.G6 U1.G8 U1.H7 U1.H9 U1.J8 U1.J10 U1.K7 | length 69.3
  Top Layer w0.15: v3(-9.525,11) -9.225,10.7 -8.4,10.7 v5(-7.8,10.1) ; R3.2@-4.4,3.8 -4.3,3.8 v3(-3.9,4.2)
  Top Layer w0.5: v9(2.2,-3.3) 2.2,-3.9 ; v9(3.1,-3.3) 3.1,-3.9 ; v9(4.6,-3.3) 4,-3.9 ; v9(6.2,-3.3) 5.5,-3.3 4.9,-3.9 ; 2.2,-3.9 3.1,-3.9 ; 2.2,-3.9 C33.1@2.2,-4.3 C39.1@3.1,-4.3 ; C39.1@3.1,-4.3 3.1,-3.9 ; C39.1@3.1,-4.3 C49.1@4,-4.3 ; 3.1,-3.9 4,-3.9 ; C49.1@4,-4.3 C45.1@4.9,-4.3 4.9,-3.9 ; C49.1@4,-4.3 4,-3.9 ; 4,-3.9 4.9,-3.9
  Top Layer w1: L2.1@-7.8,8.5 -7.6,8.7 -7.6,9.5 -7.6,9.7 C24.1@-7.5,9.8
  Mid-Layer 3 w0.15: v3(-9.525,11) -9.525,9.125 -4.6,4.2 v3(-3.9,4.2)
  Mid-Layer 4 w0.5: v9(4.6,-3.3) v9(6.2,-3.3)
  Bottom Layer w0.2: v9(2.2,-3.3) 3,-2.5 3,1.1 2.8,1.3 2.4,1.3 2.2,1.5 2.2,2.1 U1.G6@2.6,2.5 ; v9(3.1,-3.3) 3.8,-2.6 3.8,0.3 4,0.5 4.4,0.5 4.6,0.7 4.6,1.3 U1.F9@5,1.7 5.4,1.3 5.4,-1.7 5.2,-1.9 4.8,-1.9 4.6,-2.1 v9(4.6,-3.3) 5.4,-3.3 6.2,-2.5 6.2,2.7 6,2.9 5.4,2.9 U1.H9@5,3.3 ; U1.J8@4.2,4.1 4.6,4.5 5.4,4.5 U1.J10@5.8,4.1 6.2,3.7 6.8,3.7 7,3.5 7,-2.5 v9(6.2,-3.3)
  Bottom Layer w0.4: U1.K7@3.4,4.9 U1.J8@4.2,4.1 ; U1.F9@5,1.7 U1.G8@4.2,2.5 U1.H7@3.4,3.3 U1.J8@4.2,4.1 ; U1.H9@5,3.3 U1.J8@4.2,4.1
  other v5: -7.8,9.5 -7.2,9.5 -7.2,10.1
+1V25: C10.2 U1.C1 U1.L3 U4.F1 U8.1 | length 18.5
  Mid-Layer 2 w0.25: v1(-3.5,-0.3) -3.1,-0.7 -3.1,-7.2 v3(-3.4,-7.5)
  Mid-Layer 3 w0.25: v1(-3.5,-0.3) -3.1,-0.7 v1(-1.4,-0.7) 0.2,0.9 v1(0.2,5.7)
  Bottom Layer w0.25: v3(-3.4,-7.5) -3.1,-7.8 C10.2@-3.1,-8.2 U8.1@-3.1,-9.1
+2V5: C15.2 C20.1 C23.1 C27.1 C31.1 C43.1 C46.1 C48.2 C50.2 C52.2 C54.2 C55.1 R15.2 R19.2 U1.D2 U1.G4 U1.H2 U1.M2 U2.12 U4.A7 U4.A9 U4.B2 U4.C8 U4.D2 U4.E8 U4.F8 U4.M7 U5.1 U8.3 U8.4 | length 135.1
  Top Layer w0.5: U5.1@-4.55,8.9 -4.55,9.75 C55.1@-4.5,9.8 -3.9,9.8 v10(-3.8,9.7)
  Mid-Layer 1 w0.2: v3(-6,-5.9) -6,-7.5 -5.7,-7.8 -3.866,-7.8 -3.7,-7.8 -3.55,-7.95 -3.05,-7.95 -2.2,-7.1 -0.9,-7.1 -0.3,-6.5 1.7,-6.5 v5(2.2,-7)
  Mid-Layer 1 w0.7: v10(-8.5,-9.1) -8.9,-9.1 -9,-9 -9,-7.6 -8.1,-6.7 -8.1,-0.4 -8.4,-0.1 -8.4,3.1 -7.625,3.875 v13(-7.175,3.875)
  Mid-Layer 2 w0.5: v13(-7.175,3.875) -7.175,-4.725 v3(-6,-5.9)
  Mid-Layer 2 w0.7: v13(-7.175,3.875) -7.9,4.6 -7.9,7.2 -6.4,8.7 -4.8,8.7 v10(-3.8,9.7)
  Mid-Layer 4 w0.5: v3(-6,-5.9) -5.8,-5.7 -3.8,-5.7 -2.2,-4.1 v2(-1,-4.1)
  Mid-Layer 4 w0.7: v10(-3.8,9.7) -3.7,9.8 -0.7,9.8 0,10.5 v11(1.4,10.5)
  Bottom Layer w0.15: U4.C8@-9.1,2.7 -8.7,3.1 -8.7,4.1 -8.8,4.2 ; -4.7,4.5 -4.7,5.1
  Bottom Layer w0.2: -5.6,5 -5.6,2.5 -5.3,2.2 -4.8,2.2 U4.D2@-4.3,1.7 ; -4.7,4.5 -4.7,4.1 U4.B2@-4.3,3.7 ; -1.9,6.1 -0.434,6.1 -0.2,5.866 -0.2,3.7 U1.H2@-0.6,3.3 ; v2(-1,-4.1) -1,-3.5 -0.2,-2.7 -0.2,-0.3 U1.D2@-0.6,0.1 ; -1,9.3 -1,6.9 U1.M2@-0.6,6.5 ; U1.G4@1,2.5 1.4,2.9 1.4,9.2 1.1,9.5
  Bottom Layer w0.25: U4.A9@-9.9,4.7 -9.4,4.2 -8.8,4.2 ; U4.F8@-9.1,-0.3 U4.E8@-9.1,0.7 ; R19.2@-6.9,-9.1 -6.9,-9.3 -6.5,-9.7 -5.5,-9.7 C15.2@-4.8,-9 -4.7,-8.9 -4.1,-8.9 U8.4@-3.9,-9.1 -4.3,-9.5 U8.3@-3.9,-9.9
  Bottom Layer w0.4: C31.1@-9.2,-8 -9.2,-7.1 -10.4,-5.9 -10.4,-1.6 U4.F8@-9.1,-0.3 ; -8.8,4.2 U4.A7@-8.3,4.7 -8.3,5.2 -7.8,5.7 -7.3,5.7 ; U4.M7@-8.3,-6.3 -6.9,-7.7 C46.1@-6.9,-8.2 ; C20.1@-7.3,6.4 -7.3,5.7 ; v13(-7.175,3.875) -7.175,5.575 -7.3,5.7 ; -5.6,5 -4.7,5.9 ; -4.7,5.1 -3.9,5.9 -3.9,6.1 ; C27.1@-4.7,6.4 -4.7,5.9 ; C23.1@-3.9,6.4 -3.9,6.1 ; v10(-3.8,9.7) -3,10.5 C54.2@-2,10.5 -2,9.9 -2.4,9.5 -2.4,6.6 -2,6.2 -1.9,6.1 ; -1,9.3 -0.4,9.9 0.4,9.9 ; C52.2@0.7,10.5 0.7,10.2 ; 0.9,9.6 0.8,9.5 ; C50.2@2.1,10.5 1.75,10.15 1.7,10.1 ; -4.7,5.9 -4.5,6.1 -3.9,6.1 ; 0.4,9.9 0.7,10.2 ; 0.4,9.9 0.55,9.75 ; 0.55,9.75 0.8,9.5 ; 0.55,9.75 1.35,9.75 ; 0.7,10.2 0.8,10.1 1.4,10.1 1.7,10.1 ; 0.8,9.5 1.1,9.5 1.35,9.75 ; 1.35,9.75 1.7,10.1
  Bottom Layer w0.5: C31.1@-9.2,-8 C43.1@-9.2,-8.9 -9,-9.1 v10(-8.5,-9.1) R19.2@-6.9,-9.1 C46.1@-6.9,-8.2 ; C27.1@-4.7,6.4 -4.121,6.4 C23.1@-3.9,6.4 ; C52.2@0.7,10.5 v11(1.4,10.5) v11@1.8,10.5
  Bottom Layer w0.7: C23.1@-4.121,6.4 -4.01,6.51 -4,6.521 -4,7.2 -3.9,7.3 -3.9,9.6 v10(-3.8,9.7)
+3V3: C3.2 C4.1 C5.2 C9.2 C11.2 C12.1 C16.1 C18.2 C21.2 C26.1 C32.1 C38.2 C41.2 C44.2 C53.1 C57.2 C58.2 C59.2 L1.1 PIN3.12 R1.1 R2.2 R6.1 R9.1 R10.1 R11.1 R12.1 R18.2 U1.B1 U1.B4 U1.B8 U1.B12 U1.D9 U1.D14 U1.E12 U1.F7 U1.G10 U1.H14 U1.J6 U1.J12 U1.K9 U1.L4 U1.M7 U1.M12 U1.M14 U1.P4 U1.P8 U1.P12 U1.R12 U3.1 U3.15 U5.4 U5.6 U6.4 U7.18 U7.19 U7.20 X1.4 X2.1 | length 213.9
  Top Layer w0.15: L1.1@-4.8,-5.2 -4.4,-4.8 R2.2@-4.4,-2.1
  Top Layer w0.25: v5(-4.55,6.7) -4.454,6.604 0.096,6.604 ; v1(1,5.7) 0.096,6.604 ; v1(1,8.1) 1,7.508 0.096,6.604
  Top Layer w0.4: v1(3.4,6.5) 4,7.1 4,7.9 ; v1(9.2,-6.8) v1(9.2,-5.9) ; v3(-10.6,-7.4) v3(-10.6,-7) -10.2,-7 C32.1@-9.8,-7.4 ; v3(-10.6,-7.4) C32.1@-9.8,-7.4 ; v3(-10.6,-7.4) v3(-10.6,-7.8) -10.2,-7.8 C32.1@-9.8,-7.4 ; v3(-5,-7.3) L1.1@-5,-5.4 ; v3(-5,-7.3) v3(-5.4,-7.3) -5.4,-5.8 L1.1@-5,-5.4 ; v3(-5,-7.3) v3(-4.6,-7.3) ; L1.1@-5,-5.4 L1.1@-4.6,-5.8 ; L1.1@-5,-5.4 L1.1@-4.8,-5.2 -4.6,-5.4 L1.1@-4.6,-5.8 ; v3(-4.6,-7.3) L1.1@-4.6,-5.8 ; v3(-4.6,-7.3) v3(-4.2,-7.3) -4.2,-6.2 L1.1@-4.6,-5.8
  Top Layer w0.5: 4,7.9 v1(4.2,8.1) 4.85,8.75 6.15,8.75 ; X1.4@5.55,3.105 5.645,3.2 6.5,3.2 v1(7.4,4.1) ; v1(6.5,10.5) 6.5,9.1 6.15,8.75 ; C53.1@7.6,-6.8 7.4,-7 R6.1@6.5,-7 6.5,-8.2 U6.4@6.55,-8.25 6.9,-8.6 v1(7.8,-8.6) v3(7.8,-9.1) ; v1(10.5,-4.1) 10.5,5 v1(9,6.5) v1(7.4,6.5) 7.4,7 6.7,7.7 6.7,8.2 6.15,8.75 ; v1@-2,-8.125 X2.1@-1.66,-8.465 -1.66,-8.34 v1(-2,-8) v1@-2,-8.125
  Top Layer w0.7: v1(-2,-8) -1.1,-7.1 v1(-0.2,-7.1) v1(-0.2,-8)
  Top Layer w1: L1.1@-4.8,-5.2 L1.1@-4.8,-4.1
  Mid-Layer 1 w0.5: v5(-5.85,6.7) v5(-4.55,6.7)
  Mid-Layer 2 w0.4: v3(-10.6,-7.8) -9.1,-7.8 -8.5,-7.2 -7.4,-7.2 -6.9,-7.7 -5.4,-7.7 -5,-7.7 -4.6,-7.7 -4.4,-7.5 v3(-4.2,-7.3) ; v3(-10.6,-7.4) -9.2,-7.4 -8.6,-6.8 -7.3,-6.8 -6.8,-7.3 v3(-5.4,-7.3) v3(-5,-7.3) v3(-4.6,-7.3) v3(-4.2,-7.3) ; v3(-4.2,-7.3) -4.2,-6.8 -4.3,-6.7 -4.4,-6.7 -4.8,-6.7 -6.4,-6.7 -7.1,-6 -8.8,-6 -9.4,-6.6 -10.2,-6.6 v3(-10.6,-7) -9.3,-7 -8.7,-6.4 -7.2,-6.4 -6.7,-6.9 -5.4,-6.9 -5,-6.9 -4.6,-6.9 -4.4,-7.1 v3(-4.2,-7.3)
  Mid-Layer 2 w0.7: v3(-5.4,-7.3) -5.2,-7.1 -5,-6.9 -4.8,-6.7 -4.4,-6.3 ; -4.4,-7.1 -4.4,-6.7 -4.4,-6.3 ; v3(-4.2,-7.3) -3.8,-6.9 -3.8,-2 -5,-0.8 -5,0.2 -3.8,1.4 -3.8,2.9 -6.1,5.2 ; -6.1,5.2 -6.1,6.45 ; -6.1,5.2 -6.1,4.6 -4.4,2.9 -4.4,1.7 -5.6,0.5 -5.6,-1.1 -4.4,-2.3 -4.4,-6.3 ; -6.1,6.45 v5(-5.85,6.7) v5(-4.55,6.7) -4.8,6.45 -6.1,6.45
  Mid-Layer 4 w0.4: v2(-10.5,6.4) -9.7,6.4 ; v2(-3.1,8.5) -3.1,8.9 ; v1(1,8.1) 0.5,8.6 -2.2,8.6 -2.5,8.9 -3.1,8.9 ; v1@3.8,10.4 v1(3.9,10.5) ; v2(7.4,0.9) 8,0.3 8.8,0.3 v2(9,0.1) ; -9.7,6.4 -9.3,6.8 ; -9.7,6.4 -8.9,6.4 ; -9.3,6.8 -8.9,7.2 ; -9.3,6.8 -8.9,6.4 ; -8.9,6.4 v2(-8.1,6.4) -8.6,6.9 ; -8.9,6.4 -8.6,6.7 -8.6,6.9 ; -8.9,6.4 -8.9,7.2 ; -8.9,7.2 -8.9,8.23 -7.03,10.1 -5.4,10.1 -4.2,8.9 -3.1,8.9 ; -8.9,7.2 -8.6,6.9
  Mid-Layer 4 w0.5: v1@3.8,10.4 3.8,8.5 v1(4.2,8.1) ; v2(5,0.1) 7.8,-2.7 v2(7.8,-4.1) ; v2(5.8,2.5) 5.8,6.5 6.4,7.1 6.4,9.7 6.5,9.8 v1(6.5,10.5) ; v1(7.4,4.1) 8.2,4.1 v2(9,3.3) 10.5,1.8 v1(10.5,-4.1) ; v1(7.4,6.5) 7.4,6.9 7.2,7.1 7.2,8.5 7.55,8.85 7.55,9.249 7.901,9.6 8.4,9.6 v2(9.3,10.5)
  Bottom Layer w0.15: U3.15@-8.75,7.25 -8.75,7.05 v2(-8.1,6.4)
  Bottom Layer w0.2: 0.6,-2.7 0.6,-1.9 U1.B4@1,-1.5 ; v1(2.6,4.1) 3,3.7 3,2.1 U1.F7@3.4,1.7 ; v1(3.4,6.5) 3.8,6.9 3.8,7.7 v1(4.2,8.1) ; U1.B8@4.2,-1.5 4.6,-1.1 4.6,-0.3 v2(5,0.1) ; U1.B12@7.4,-1.5 7.8,-1.9 v2(7.8,-4.1) ; v2(7.4,0.9) 7.8,0.5 8.6,0.5 v2(9,0.1) 8.6,-0.3 8.6,-4 v2(8.7,-4.1) ; v1(7.4,4.1) 7.8,3.7 8.6,3.7 v2(9,3.3) ; U1.P12@7.4,8.1 U1.R12@7.4,8.9
  Bottom Layer w0.3: v2(-10.5,6.4) -10.5,7.8 -10.25,8.05 U3.1@-10.05,8.05 ; v1(-0.2,-5) 0,-5 0.4,-4.6 0.4,-2.9 0.6,-2.7 ; U1.R12@7.4,8.9 7.5,9 7.5,10.3 7.4,10.4 C21.2@7.5,10.5
  Bottom Layer w0.4: v3(4.5,5.3) 4.6,5.3 U1.K9@5,4.9
  Bottom Layer w0.5: v1(-0.2,-10.2) 0,-10.4 0.575,-10.4 U7.20@0.875,-10.1 U7.19@1.525,-10.1 2,-10.1 ; v1(6.5,10.5) C21.2@7.5,10.5 ; R9.1@7.8,-9.6 v3(7.8,-9.1) v1(7.8,-8.6) ; R10.1@7.8,-6 7.9,-5.9 v1(9.2,-5.9) v1(9.2,-6.8) ; v2(7.8,-4.1) v2(8.7,-4.1) C16.1@9.6,-4.1 v1(10.5,-4.1)
  other v1: -1.4,-1.5
  other v7: 2.2,-6
+VBAT: C1.2 C2.1 C6.2 C7.1 PIN1.10 PIN67.8 U2.1 U2.16 | length 54.7
  Top Layer w0.4: U2.16@-9.775,4.375 -9.775,5.525 C6.2@-9.7,5.6
  Top Layer w0.5: C2.1@-10,6.525 -9.888,6.413 -9.7,6.225 C6.2@-9.7,5.6 ; U2.1@-9.775,-1.375 -9.775,-2.525 C7.1@-9.7,-2.6
  Top Layer w0.7: C1.2@-9.8,-4.225 -9.7,-4.125 C7.1@-9.7,-2.6
  Mid-Layer 1 w0.7: PIN67.8@-11.43,-8.89 PIN67.8@-11.21,-8.89 ; v6@-10.2,6.5 v6(-10.3,6.6) -10,6.3 -10,-4 v6@-10.2,-4.2 ; -9.8,-6.7 -9.9,-6.6 ; v6@-9.6,6.5 v6(-9.7,6.6) -9.3,6.2 -9.3,-4.1 v6(-9.5,-4.3) -9.6,-4.2 -9.6,-4.3 -9.6,-6.8 -9.9,-7.1 ; PIN67.8@-11.21,-8.89 -10.59,-8.89 ; PIN67.8@-11.21,-8.89 -11.033,-9.067 ; -11.033,-9.067 -10.5,-9.6 ; -11.033,-9.067 -10.767,-9.067 -10.59,-8.89 ; -10.59,-8.89 -9.9,-8.2 ; -10.59,-8.89 -10.5,-8.89 ; -10.5,-9.6 -10.5,-8.89 ; -10.5,-9.6 -10.5,-11.09 PIN1.10@-10.16,-11.43 -9.9,-11.17 -9.9,-8.9 ; -10.5,-8.89 -9.91,-8.89 -9.9,-8.9 ; v6@-10.2,-4.2 -10.2,-4.3 -10.2,-6.3 -9.9,-6.6 ; v6@-10.2,-4.2 v6(-10.1,-4.3) ; v6@-10.2,-4.2 v6(-10.1,-4.3) ; v6(-10.1,-4.3) -9.9,-4.5 -9.9,-6.6 ; -9.9,-8.9 -9.9,-8.2 ; -9.9,-8.2 -9.9,-7.1 ; -9.9,-7.1 -9.9,-6.6
  Mid-Layer 2 w1: PIN67.8@-11.43,-8.89 -10.81,-8.89 -10.16,-9.54 PIN1.10@-10.16,-11.43
  Mid-Layer 3 w1: PIN67.8@-11.43,-8.89 -10.71,-8.89 -10.16,-9.44 PIN1.10@-10.16,-11.43
A0: U1.J5 U4.K7 | length 19.4
  Mid-Layer 2 w0.1: v3(-2,-5.6) -2,-5.3 2.2,-1.1 2.2,3.7 v1(1.8,4.1)
  Bottom Layer w0.1: U4.K7@-8.3,-4.3 -5.9,-6.7 -4,-6.7 -2.9,-5.6 v3(-2,-5.6)
A1: U1.H4 U4.L8 | length 19.7
  Mid-Layer 3 w0.1: v3(-0.4,-5.6) -0.1,-5.6 1,-4.5 v1(1,3.3)
  Mid-Layer 4 w0.1: v2(-9.1,-5.3) -7.75,-6.65 -3.75,-6.65 -2.3,-5.2 -1.3,-5.2 -1.15,-5.35 -0.65,-5.35 v3(-0.4,-5.6)